# EAGLE board IRK (EAGLE 5.09)
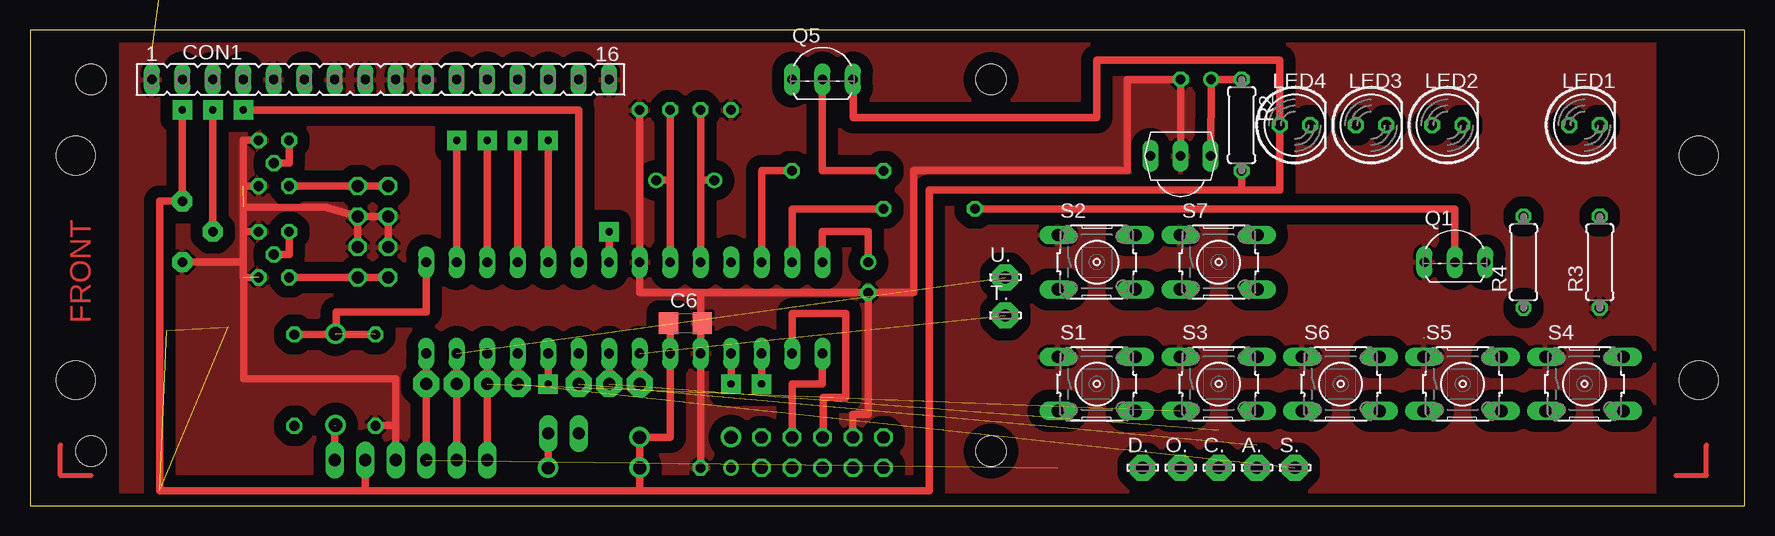
[diagram p0: board, top side]
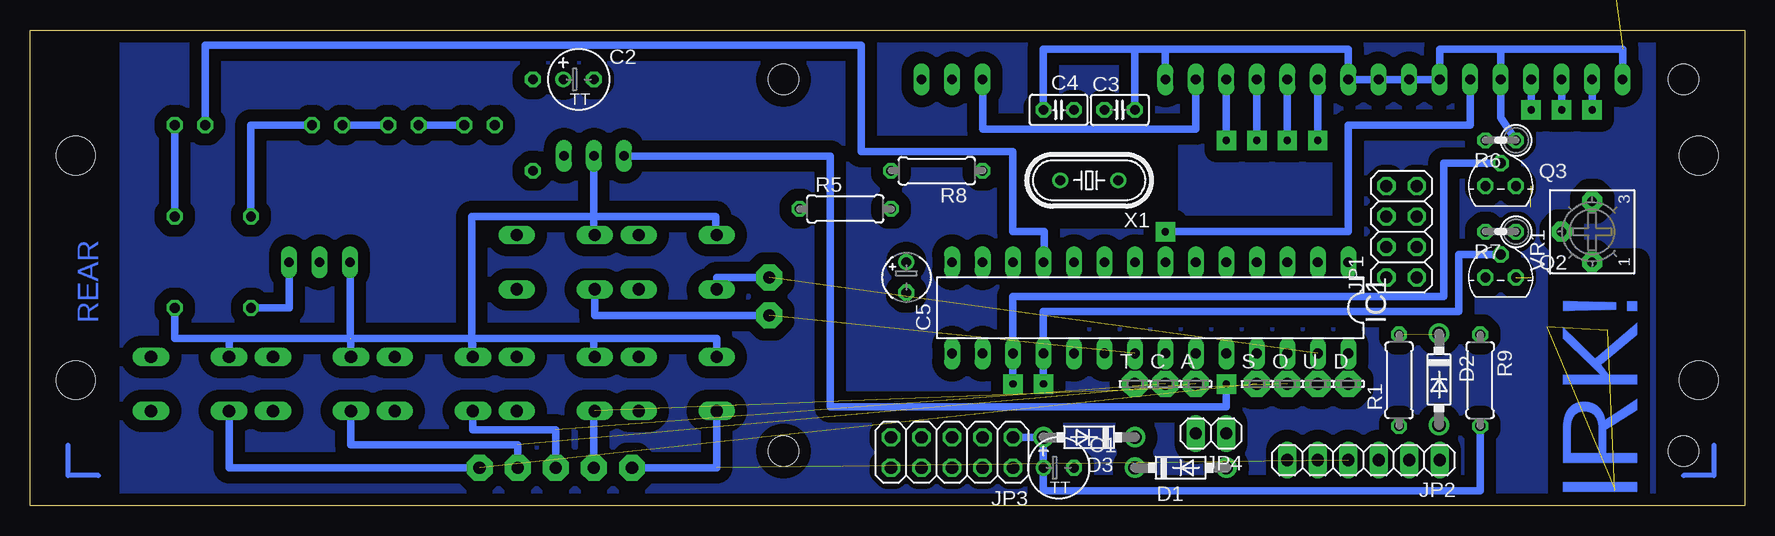
[diagram p1: board, bottom side, seen from below]

Size 142.88 x 39.69 mm. Coordinates in mm from the lower left corner, seen from the top.
Outline: 0,0 142.88,0 142.88,39.69 0,39.69 0,0
Copper layers (1*16): Top 0.035mm / dielectric 1.5mm / Bottom 0.035mm
Design rules "default *": minimum track width 20mil, minimum drill 24mil, track to track 8mil, track to pad 8mil, pad to pad 8mil, via to via 8mil, smd to smd 8mil, copper to edge 20mil, drill to drill 8mil, minimum pad ring 10mil, minimum via ring 20mil, stop-mask expansion 4mil, vias tented up to drill 0mil, thermal gap 10mil
Holes 2.5 mm at 5.08,35.56 80.08,35.56 5.08,4.56 80.08,4.56
Holes 3.2 mm at 3.81,29.21 3.81,10.48 139.06,29.21 139.06,10.48
bRestrict: area 48.2,24.1 to 60.7,30.3

## Footprints (pad centres in the part's own frame; a part is rotated, then mirrored left to right if it is on the bottom)
LSP10 = drill 1.016 pad 2.159 octagon: MP 0,0
TT2D5 = drill 0.813 round: + -1.27,0 | drill 0.813 octagon: - 1.27,0
C025-025X050 = drill 0.813 octagon: 1 -1.27,0; 2 1.27,0
TT2D4 = drill 0.813 round: + -1.27,0 | drill 0.813 octagon: - 1.27,0
C1206 = smd 1.6 x 1.8: 1 -1.4,0; 2 1.4,0
FE16 = drill 0.813 long: 1 -19.05,0; 2 -16.51,0; 3 -13.97,0; 4 -11.43,0; 5 -8.89,0; 6 -6.35,0; 7 -3.81,0; 8 -1.27,0; 9 1.27,0; 10 3.81,0; 11 6.35,0; 12 8.89,0; 13 11.43,0; 14 13.97,0; 15 16.51,0; 16 19.05,0
DO41-7.6 = drill 1.1 pad 1.7 round: A 3.81,0; C -3.81,0
DIL28-3 = drill 0.813 long: 1 -16.51,-3.81; 2 -13.97,-3.81; 3 -11.43,-3.81; 4 -8.89,-3.81; 5 -6.35,-3.81; 6 -3.81,-3.81; 7 -1.27,-3.81; 8 1.27,-3.81; 9 3.81,-3.81; 10 6.35,-3.81; 11 8.89,-3.81; 12 11.43,-3.81; 13 13.97,-3.81; 14 16.51,-3.81; 15 16.51,3.81; 16 13.97,3.81; 17 11.43,3.81; 18 8.89,3.81; 19 6.35,3.81; 20 3.81,3.81; 21 1.27,3.81; 22 -1.27,3.81; 23 -3.81,3.81; 24 -6.35,3.81; 25 -8.89,3.81; 26 -11.43,3.81; 27 -13.97,3.81; 28 -16.51,3.81
2X04 = drill 1.016 octagon: 1 -3.81,-1.27; 2 -3.81,1.27; 3 -1.27,-1.27; 4 -1.27,1.27; 5 1.27,-1.27; 6 1.27,1.27; 7 3.81,-1.27; 8 3.81,1.27
1X06 = drill 1.016 long: 1 -6.35,0; 2 -3.81,0; 3 -1.27,0; 4 1.27,0; 5 3.81,0; 6 6.35,0
2X05 = drill 1.016 octagon: 1 -5.08,-1.27; 2 -5.08,1.27; 3 -2.54,-1.27; 4 -2.54,1.27; 5 0,-1.27; 6 0,1.27; 7 2.54,-1.27; 8 2.54,1.27; 9 5.08,-1.27; 10 5.08,1.27
1X02 = drill 1.016 long: 1 -1.27,0; 2 1.27,0
TUXGR_16X2_R2 = drill 1 pad 1.676 round: 1 -32,15.5; 2 -29.46,15.5; 3 -26.92,15.5; 4 -24.38,15.5; 5 -21.84,15.5; 6 -19.3,15.5; 7 -16.76,15.5; 8 -14.22,15.5; 9 -11.68,15.5; 10 -9.14,15.5; 11 -6.6,15.5; 12 -4.06,15.5; 13 -1.52,15.5; 14 1.02,15.5; 15 3.56,15.5; 16 6.1,15.5 | hole 2.5: -37.5,-15.5; 37.5,-15.5; -37.5,15.5; 37.5,15.5
LED5MM = drill 0.813 octagon: A -1.27,0; K 1.27,0
TO92-EBC = drill 0.813 long: B 0,-1.27; C 2.54,-1.27; E -2.54,-1.27
TO-92 = drill 0.813 octagon: 1 -1.27,0; 2 0,1.905; 3 1.27,0
TSOP18XX = drill 0.813 long: GND -0.001,-0.027; OUT -2.501,-0.027; VCC 2.499,-0.027
TO92-EBC' = drill 0.813 long: B 0,-1.27; C -2.54,-1.27; E 2.54,-1.27
0207/7 = drill 0.813 octagon: 1 -3.81,0; 2 3.81,0
0207/2V = drill 0.813 octagon: 1 -1.27,0; 2 1.27,0
B3F-10XX = drill 1.016 long: 1 -3.251,2.261; 2 3.251,2.261; 3 -3.251,-2.261; 4 3.251,-2.261
3362P = drill 0.813 pad 1.676 octagon: 1 -2.54,0; 2 0,2.54; 3 2.54,0
HC49/S = drill 0.813 round: 1 -2.413,0; 2 2.413,0

## Placement (x,y rotation side)
A  LSP10  [LSP10]  45.72,10.16 0 bottom
A.  LSP10  [LSP10]  102.23,3.17 0 top
C  LSP10  [LSP10]  48.26,10.16 0 bottom
C1  4.7uF  [TT2D5]  57.15,3.17 0 bottom
C2  4.7uF  [TT2D5]  97.16,35.56 0 bottom
C3  22pF  [C025-025X050]  52.07,33.02 0 bottom
C4  22pF  [C025-025X050]  57.15,33.02 180 bottom
C5  220nF  [TT2D4]  69.85,19.05 270 bottom
C6  100nF  [C1206]  54.61,15.24 0 top
C.  LSP10  [LSP10]  99.06,3.17 0 top
CON1  FE16-1  [FE16]  29.21,35.56 0 top
D  LSP10  [LSP10]  33.02,10.16 0 bottom
D1  1N5817-B  [DO41-7.6]  46.99,3.17 0 bottom
D2  1N5817-B  [DO41-7.6]  25.46,10.54 270 bottom
D3  1N5817-B  [DO41-7.6]  54.61,5.71 180 bottom
D.  LSP10  [LSP10]  92.71,3.17 0 top
IC1  PIC18F2550_28DIP  [DIL28-3]  49.53,16.51 180 bottom
JP1  PWR/RST  [2X04]  28.57,22.86 90 bottom
JP2  ICSP  [1X06]  31.75,3.81 180 bottom
JP3  USB  [2X05]  66.04,4.45 180 bottom
JP4  Vsb  [1X02]  44.45,6.03 180 bottom
LCD1  HD44780  [TUXGR_16X2_R2]  47.24,60.63 0 top  (outside the outline)
LED1  ACTVITY  [LED5MM]  129.54,31.75 0 top
LED2  TSAL4700  [LED5MM]  118.11,31.75 0 top
LED3  [LED5MM]  111.76,31.75 0 top
LED4  [LED5MM]  105.41,31.75 0 top
O  LSP10  [LSP10]  38.1,10.16 0 bottom
O.  LSP10  [LSP10]  95.89,3.17 0 top
Q1  2N2222  [TO92-EBC]  118.75,21.59 0 top
Q2  2N7000  [TO-92]  20.32,19.05 0 bottom
Q3  2N7000  [TO-92]  20.32,26.67 0 bottom
Q4  TSOP4838  [TSOP18XX]  95.89,29.21 0 top
Q5  BC557B  [TO92-EBC']  66.04,36.83 0 top
R1  100k  [0207/7]  28.79,10.47 90 bottom
R2  100  [0207/7]  100.97,31.75 270 top
R3  470  [0207/7]  130.81,20.32 90 top
R4  22  [0207/7]  124.46,20.32 90 top
R5  4.7k  [0207/7]  74.93,24.77 0 bottom
R6  10k  [0207/2V]  20.32,30.48 180 bottom
R7  10k  [0207/2V]  20.32,22.86 180 bottom
R8  4.7k  [0207/7]  67.31,27.94 180 bottom
R9  10k  [0207/7]  22.03,10.47 270 bottom
S  LSP10  [LSP10]  40.64,10.16 0 bottom
S1  DOWN  [B3F-10XX]  88.9,10.16 0 top
S2  UP  [B3F-10XX]  88.9,20.32 0 top
S3  OK  [B3F-10XX]  99.06,10.16 0 top
S4  SHIFT  [B3F-10XX]  129.54,10.16 0 top
S5  ALT  [B3F-10XX]  119.38,10.16 0 top
S6  CTL  [B3F-10XX]  109.22,10.16 0 top
S7  TEACH  [B3F-10XX]  99.06,20.32 0 top
S.  LSP10  [LSP10]  105.41,3.17 0 top
T  LSP10  [LSP10]  50.8,10.16 0 bottom
T.  LSP10  [LSP10]  81.28,15.88 0 top
U  LSP10  [LSP10]  35.56,10.16 0 bottom
U.  LSP10  [LSP10]  81.28,19.05 0 top
VR1  10k  [3362P]  12.7,22.86 90 bottom
X1  8 MHz  [HC49/S]  54.61,27.15 180 bottom

## Library data of the parts
A A. C C. D D. O O. S S. T T. U U. = solpad
C1-C6 R1-R9 = rcl
CON1 = con-lsta-with16
D1-D3 = diode
IC1 = microchip
JP1-JP4 = pinhead
LCD1 = display-lcd
LED1-LED4 = led
Q1 = transistor
Q2 Q3 = 2n7000
Q4 = tsop
Q5 = transistor-pnp
S1-S7 = switch-omron
VR1 = BOURNS
X1 = crystal

## Nets
+5V: C6.1 CON1.2 D1.C D3.C IC1.20 JP2.2 LED4.A Q5.E R2.2 VR1.3
GND: C1.- C2.- C3.2 C4.2 C5.- C6.2 CON1.1 CON1.5 CON1.7 CON1.8 CON1.9 CON1.10 CON1.16 IC1.8 IC1.19 JP1.3 JP1.4 JP1.5 JP1.6 JP2.3 JP3.7 LCD1.1 Q1.E Q2.3 Q3.3 Q4.GND R1.1 R3.1 R6.1 R7.1 S1.1 S2.1 S3.1 S4.1 S5.1 S6.1 S7.1 VR1.1
N$1: CON1.11 IC1.2
N$2: CON1.12 IC1.3
N$3: CON1.13 IC1.4
N$4: CON1.14 IC1.5
N$5: CON1.4 IC1.6
N$6: CON1.6 IC1.7
N$7: CON1.3 VR1.2
N$8: D2.C IC1.1 R1.2 R9.1
N$9: C3.1 IC1.9 X1.1
N$10: IC1.24 Q4.OUT
N$11: JP1.1 JP1.2 Q2.1
N$12: D..MP D.MP IC1.28 JP2.4 S1.3
N$13: IC1.27 JP2.5 S2.3 U..MP U.MP
N$14: IC1.26 JP2.6 O..MP O.MP S3.3
N$15: IC1.25 S4.3 S..MP S.MP
N$16: A..MP A.MP IC1.23 S5.3
N$17: C..MP C.MP IC1.22 S6.3
N$18: IC1.21 S7.3 T..MP T.MP
N$19: C5.+ IC1.14
N$20: LED1.K R3.2
N$21: C1.+ D3.A JP3.1 R9.2
N$22: JP1.7 JP1.8 Q3.1
N$23: IC1.16 JP3.5
N$24: IC1.15 JP3.3
N$25: LED2.K R4.2
N$26: LED2.A LED3.K
N$27: LED3.A LED4.K
N$28: IC1.13 R5.2
N$29: Q1.B R5.1
N$30: Q1.C R4.1
N$31: CON1.15 Q5.C
N$34: IC1.12 R8.1
N$35: C4.1 IC1.10 X1.2
N$36: Q5.B R8.2
N$37: IC1.17 Q3.2 R6.2
N$38: IC1.18 Q2.2 R7.2
N$45: D2.A JP2.1
N$46: IC1.11 LED1.A
N$50: C2.+ Q4.VCC R2.1
V+: D1.A JP4.1
VCC: LCD1.2

## Tracks (layer width: path | path; a pad name or v marks a point on that pad's centre or on a via)
+5V  (via drill 0.6)  (3 unrouted)
  Top 0.61: 10.79,1.39 10.79,25.4 VR1.3 v12.7,33.02 | 10.83,1.27 27.94,1.27 | 27.94,1.27 50.8,1.27 | 50.8,1.27 D1.C D3.C 53.34,5.71 IC1.20 53.34,15.24 C6.1 | 100.97,26.35 74.93,26.35 74.93,1.27 50.8,1.27 | 100.97,26.35 R2.2 | 100.97,26.35 104.14,26.35 LED4.A 104.14,37.15 88.9,37.15 88.9,32.36 68.61,32.36 68.61,35.56 Q5.E | 27.94,1.27 JP2.2
  Bottom 0.61: v12.7,33.02 CON1.2
GND  (5 unrouted)
  Top 0.61: Q4.GND C2.- 91.44,35.56 91.44,27.94 73.66,27.94 73.66,17.78 C5.- | C3.2 IC1.8 50.8,17.78 55.88,17.78 | JP1.4 JP1.6 JP1.5 | JP1.5 JP1.3 | 17.8,24.91 24.74,24.89 JP1.5 | C5.- 69.85,9.02 69.85,7.62 68.58,7.62 JP3.7 | C1.- IC1.19 55.88,15.24 | 17.78,20.32 17.78,19.05 | VR1.1 17.78,20.32 | R6.1 17.78,30.48 17.78,26.67 | 17.78,20.32 17.78,22.86 | 17.78,22.86 R7.1 | 17.78,26.67 Q3.3 | 17.78,22.86 17.78,26.67 | 55.88,15.24 C6.2 | 55.88,17.78 55.88,15.24 | 55.88,17.78 C5.- | 30.49,6.69 30.49,10.58 17.8,10.58 17.8,19.05 Q2.3 | 30.49,6.69 30.49,3.81 | R1.1 28.79,6.69 30.49,6.69
  Bottom 0.61: 20.32,38.1 25.4,38.1 CON1.7 CON1.8 CON1.9 CON1.10 33.02,38.1 48.26,38.1 | 106.05,13.97 106.05,12.5 S6.1 105.97,13.41 106.05,13.97 | 106.05,13.97 95.89,13.97 | 95.89,13.97 95.89,12.5 S3.1 | S2.1 85.72,22.66 85.72,24.13 95.88,24.13 | 106.05,13.97 106.05,24.13 95.89,24.13 | S5.1 116.13,13.97 | 106.05,13.97 116.2,13.97 | 116.2,13.97 126.29,13.97 | 126.29,13.97 S4.1 | R3.1 130.81,13.97 126.29,13.97 | 116.2,13.97 Q1.E | C4.2 58.42,38.1 50.8,38.1 | S1.1 85.65,13.97 95.89,13.97 | R6.1 20.32,32.38 CON1.5 20.32,38.1 | 20.32,38.1 10.16,38.1 CON1.1 | 95.88,24.13 95.89,24.13 | S7.1 95.89,22.58 95.89,24.13 | Q4.GND 95.88,24.13 | 50.8,38.1 C3.2 | 48.26,38.1 50.8,38.1 | 48.26,38.1 CON1.16
  pour Top (isolate 1.016): 7.62,0 135.35,0 135.35,39.52 7.62,39.52
N$1  (via drill 0.6)
  Top 0.61: IC1.2 v35.56,30.48
  Bottom 0.61: v35.56,30.48 CON1.11
N$2  (via drill 0.6)
  Top 0.61: IC1.3 v38.1,30.48
  Bottom 0.61: v38.1,30.48 CON1.12
N$3  (via drill 0.6)
  Top 0.61: IC1.4 v40.64,30.48
  Bottom 0.61: v40.64,30.48 CON1.13
N$4  (via drill 0.6)
  Top 0.61: IC1.5 v43.18,30.48
  Bottom 0.61: v43.18,30.48 CON1.14
N$5  (via drill 0.6)
  Top 0.61: IC1.6 45.72,33.02 v17.78,33.02
  Bottom 0.61: v17.78,33.02 CON1.4
N$6  (via drill 0.6)
  Top 0.61: v48.26,22.86 IC1.7
  Bottom 0.61: CON1.6 22.86,31.75 33.02,31.75 33.02,22.86 v48.26,22.86
N$7  (via drill 0.6)
  Top 0.61: VR1.2 v15.24,33.02
  Bottom 0.61: v15.24,33.02 CON1.3
N$8  (2 unrouted)
  Top 0.61: IC1.1 33.02,16.18 25.51,16.18 25.51,14.35 | R9.1 R1.2
N$9
  Top 0.61: IC1.9 53.34,27.15 | 53.34,27.15 X1.1 | 53.34,27.15 C3.1
N$10  (via drill 0.6)
  Top 0.61: v43.18,10.16 IC1.24
  Bottom 0.61: Q4.OUT 76.2,29.18 76.2,8.26 43.18,8.26 v43.18,10.16
N$11
  Top 0.61: Q2.1 JP1.1 JP1.2
N$12  (1 unrouted)
  Top 0.61: JP2.4 D.MP IC1.28
  Bottom 0.61: S1.3 85.65,3.17 D..MP
N$13  (1 unrouted)
  Top 0.61: JP2.5 U.MP IC1.27
  Bottom 0.61: U..MP 85.65,19.05 S2.3
N$14  (1 unrouted)
  Top 0.61: JP2.6 O.MP IC1.26
  Bottom 0.61: O..MP 95.89,7.82 S3.3
N$15  (1 unrouted)
  Top 0.61: S.MP IC1.25
  Bottom 0.61: S..MP 126.29,3.17 S4.3
N$16  (1 unrouted)
  Top 0.61: A.MP IC1.23
  Bottom 0.61: A..MP 102.23,5.08 116.13,5.08 S5.3
N$17  (1 unrouted)
  Top 0.61: C.MP IC1.22
  Bottom 0.61: C..MP 99.06,6.35 105.97,6.35 S6.3
N$18  (1 unrouted)
  Top 0.61: T.MP IC1.21
  Bottom 0.61: T..MP 95.81,15.88 S7.3
N$19
  Top 0.61: IC1.14 66.04,22.86 69.85,22.86 C5.+
N$20
  Bottom 0.61: R3.2 LED1.K
N$21
  Bottom 0.61: JP3.1 D3.A C1.+ 58.42,1.27 22.03,1.27 R9.2
N$22
  Top 0.61: Q3.1 JP1.7 JP1.8
N$23
  Top 0.61: JP3.5 66.12,5.71 66.12,9.02 67.99,9.02 67.99,16.02 63.5,16.02 IC1.16
N$24
  Top 0.61: JP3.3 63.5,10.16 66.04,10.16 IC1.15
N$25
  Bottom 0.61: LED2.K 124.46,31.75 R4.2
N$26
  Bottom 0.61: LED3.K LED2.A
N$27
  Bottom 0.61: LED4.K LED3.A
N$28
  Top 0.61: R5.2 63.5,24.77 IC1.13
N$29
  Top 0.61: Q1.B 118.75,24.77 R5.1
N$30
  Bottom 0.61: R4.1 121.28,16.51 Q1.C
N$31
  Bottom 0.61: Q5.C 63.5,31.43 48.26,31.43 45.72,31.43 CON1.15
N$32  (via drill 0.6)
  other vias: 58.42,10.16
N$33  (via drill 0.6)
  other vias: 60.96,10.16
N$34
  Top 0.61: IC1.12 60.96,27.94 R8.1
N$35
  Top 0.61: IC1.10 55.88,27.15 | 55.88,27.15 X1.2 | 55.88,27.15 C4.1
N$36
  Top 0.61: R8.2 66.04,27.94 Q5.B
N$37  (via drill 0.6)
  Top 0.61: Q3.2 21.59,28.57 R6.2 | v60.96,10.16 IC1.17
  Bottom 0.61: v60.96,10.16 60.96,17.46 25.08,17.46 25.08,28.57 Q3.2
N$38  (via drill 0.6)
  Top 0.61: Q2.2 21.59,20.95 R7.2 | v58.42,10.16 IC1.18
  Bottom 0.61: v58.42,10.16 58.42,16.19 23.81,16.19 23.81,20.95 Q2.2
N$40
  pour Bottom (isolate 1.016): 7.62,0 135.2,0.16 135.2,39.83 7.62,39.67
N$41
  Top 0.406: 2.54,5.08 2.54,2.54 5.08,2.54
N$42
  Top 0.406: 137.16,2.54 139.7,2.54 139.7,5.08
N$43
  Bottom 0.406: 2.54,5.08 2.54,2.54 5.08,2.54
N$44
  Bottom 0.406: 137.16,2.54 139.7,2.54 139.7,5.08
N$45  (1 unrouted)
  Top 0.61: JP2.1 25.4,6.73
N$46
  Bottom 0.61: LED1.A 128.27,38.43 91.32,38.43 91.32,38.42 73.59,38.42 73.59,29.56 60.98,29.56 60.98,22.87 58.34,22.87 58.34,20.32 IC1.11
N$50
  Top 0.61: Q4.VCC C2.+ R2.1
V+
  Top 0.61: D1.A JP4.1

## Text on the board
Top: FRONT
Bottom: REAR | IRK!